# Altium PCB SQUIDCtr_Rev0.PcbDoc (part 4 of 4)
Units mil, origin at the board's own origin, x right, y up, seen from the top; angles counter-clockwise.
Board outline 5765 x 2940 mil, 6 copper layers (Top Layer, Internal Plane 1, Mid-Layer 1, InternalPlane 2, Mid-Layer 2, Bottom Layer), stack 62.5 mil thick; 583 components, 307 nets, 1511 pads, 451 vias.
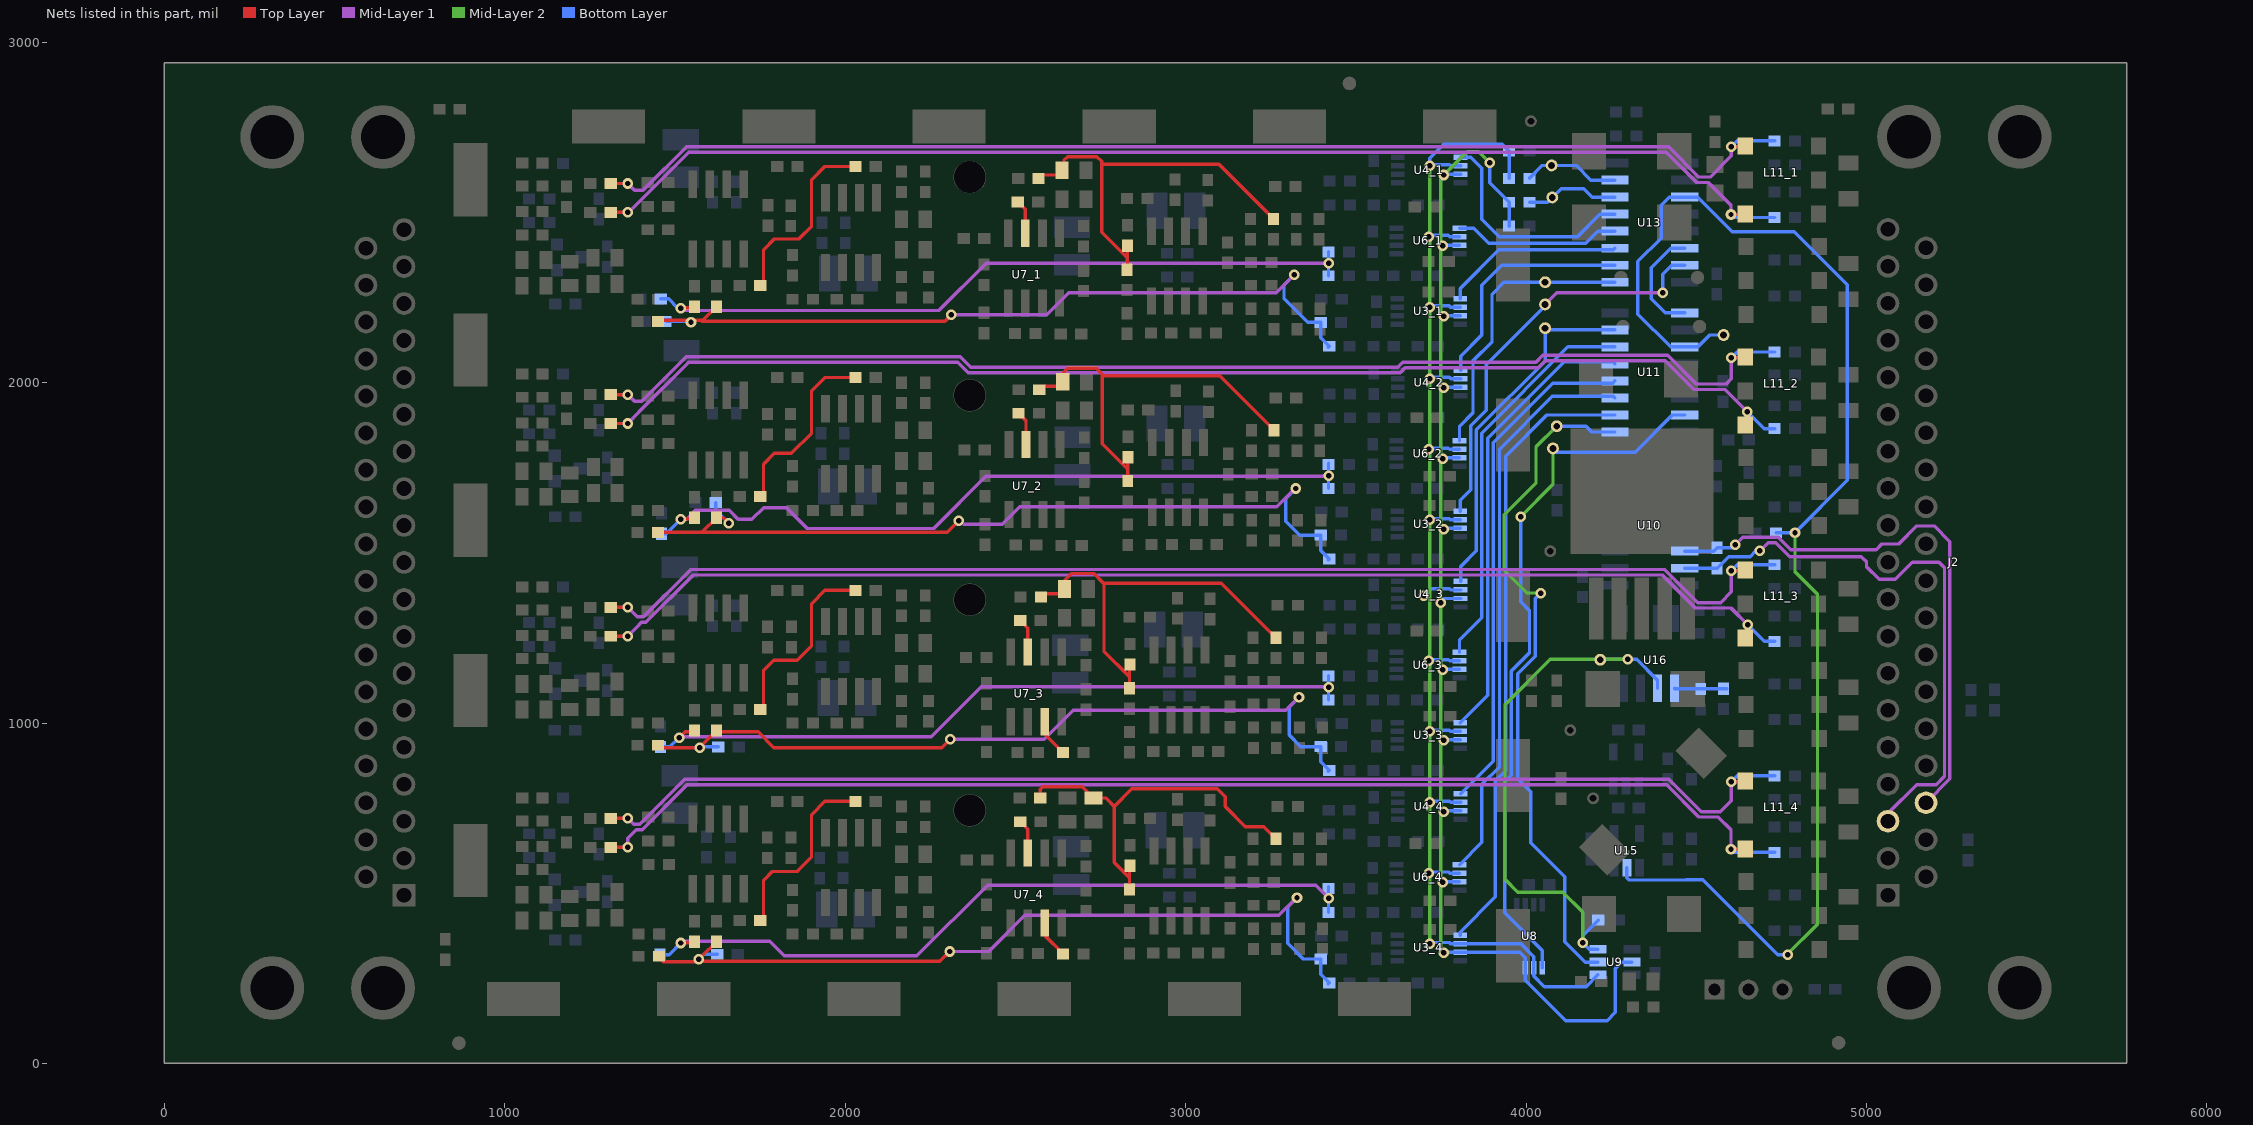
[diagram p8: the nets of this part, all layers, seen from the top]

## Via types
v1: diameter 31, hole 16, Top Layer to Bottom Layer, tented both sides, 451 vias

## Nets (pads, with @x,y where several pads share a name; then routed paths per layer and width w, separated by ;. In a path a pad name is that pad's centre, name@x,y a point inside that pad or via, vN(x,y) a via of type N, cw(c..) or ccw(c..) an arc to the next point about the centre after c; other vN are vias at no path point) (continued)
NetR47_3_2: R47_3.2 U7_3.3 | length 113.4
  Top Layer w10: U7_3.3@2586,1004 2586,967 R47_3.2@2640,913
NetR47_4_2: R47_4.2 U7_4.3 | length 113.4
  Top Layer w10: U7_4.3@2586,413 2586,376 R47_4.2@2640,322
NetR61_1: R61.1 R62.1 U16.1 | length 153.4
  Bottom Layer w10: U16.1@4436,1102 4437,1101 4522,1101 R62.1@4589,1101
NetR64_1_2: R64_1.2 U7_1.7 | length 101.1
  Top Layer w10: R64_1.2@2507,2531 2529,2509 U7_1.7@2529,2439
NetR64_2_2: R64_2.2 U7_2.7 | length 101.1
  Top Layer w10: R64_2.2@2509,1910 2531,1888 U7_2.7@2531,1818
NetR64_3_2: R64_3.2 U7_3.7 | length 101.1
  Top Layer w10: R64_3.2@2514,1301 2536,1279 U7_3.7@2536,1209
NetR64_4_2: R64_4.2 U7_4.7 | length 101.1
  Top Layer w10: R64_4.2@2514,710 2536,688 U7_4.7@2536,618
NetR71_1_2: R71_1.2 R72_1.1 | length 560.9
  Top Layer w10: R72_1.1@1750,2285 1760,2295 1760,2390 1792,2422 1864,2422 1901,2459 1901,2596 1940,2635 R71_1.2@2030,2635
NetR71_2_2: R71_2.2 R72_2.1 | length 548
  Top Layer w10: R72_2.1@1750,1665 1760,1675 1760,1761 1792,1793 1842,1793 1901,1852 1901,1976 1940,2015 R71_2.2@2030,2015
NetR71_3_2: R71_3.2 R72_3.1 | length 559.1
  Top Layer w10: R72_3.1@1750,1040 1760,1050 1760,1155 1790,1185 1859,1185 1901,1227 1901,1351 1940,1390 R71_3.2@2030,1390
NetR71_4_2: R71_4.2 R72_4.1 | length 562
  Top Layer w10: R72_4.1@1750,420 1760,430 1760,538 1786,564 1860,564 1860,566 1901,607 1901,731 1940,770 R71_4.2@2030,770
NetU11_9: U11.9 U13.14 | length 328.6
  Bottom Layer w10: U11.9@4466,2205 4409,2205 4368,2246 4368,2338 4425,2395 U13.14@4466,2395
NULLER_1_N: L11_1.3 R37_1.2 R39_1.2 | length 3622.7
  Top Layer w10: R37_1.2@1321,2500 v1(1361,2500) ; v1(4602,2494) L11_1.3@4647,2494
  Mid-Layer 1 w10: v1(1361,2500) 1363.63,2500 1540.63,2677 4412,2677 4501,2588 4535,2588 4602,2521 v1(4602,2494)
  Bottom Layer w10: v1(4602,2494) 4611,2485 R39_1.2@4730,2485
NULLER_1_P: L11_1.1@4644,2695 R11_1.2 R20_1.2 | length 3614.7
  Top Layer w10: R20_1.2@1321,2585 v1(1361,2585) ; v1(4603,2693) 4648,2693 L11_1.1@4650,2695
  Mid-Layer 1 w10: v1(1361,2585) 1381,2565 1406,2565 1534,2693 4418.63,2693 4507.63,2604 4541,2604 4603,2666 v1(4603,2693)
  Bottom Layer w10: v1(4603,2693) 4620,2710 R11_1.2@4730,2710
NULLER_2_N: L11_2.3 R37_2.2 R39_2.2 | length 3630.7
  Top Layer w10: R37_2.2@1321,1880 v1(1361,1880) ; L11_2.3@4650,1875 v1(4650,1914)
  Mid-Layer 1 w10: v1(1361,1880) 1393.5,1912.5 ; 1394.14,1914.14 1540,2060 2331,2060 2361.69,2029.31 3629.94,2029.31 3644.31,2043.69 4035.69,2043.69 4056,2064 4409,2064 4493,1980 4584,1980 v1(4650,1914)
  Bottom Layer w10: v1(4650,1914) 4699,1865 R39_2.2@4730,1865
NULLER_2_P: L11_2.1@4644,2075 R11_2.2 R20_2.2 | length 3656.5
  Top Layer w10: R20_2.2@1321,1965 v1(1361,1965) ; v1(4603,2073) 4648,2073 L11_2.1@4650,2075
  Mid-Layer 1 w10: v1(1361,1965) 1381,1945 1402,1945 1533,2076 2337.63,2076 2368.31,2045.31 3623.31,2045.31 3637.69,2059.69 4029.06,2059.69 4049.37,2080 4415.63,2080 4499.63,1996 4588,1996 4603,2011 v1(4603,2073)
  Bottom Layer w10: v1(4603,2073) 4620,2090 R11_2.2@4730,2090
NULLER_3_N: L11_3.3 R37_3.2 R39_3.2 | length 3602.4
  Top Layer w10: R37_3.2@1321,1255 v1(1361,1255) ; L11_3.3@4650,1250 4651,1251 v1(4651,1289)
  Mid-Layer 1 w10: v1(1361,1255) 1393.5,1287.5 ; 1394.14,1289.14 1401,1296 1414,1296 1553,1435 4400.37,1435 4497.37,1338 4602,1338 v1(4651,1289)
  Bottom Layer w10: v1(4651,1289) 4700,1240 R39_3.2@4730,1240
NULLER_3_P: L11_3.1@4644,1450 R11_3.2 R20_3.2 | length 3648.6
  Top Layer w10: R20_3.2@1321,1340 v1(1361,1340) ; v1(4603,1448) 4648,1448 L11_3.1@4650,1450
  Mid-Layer 1 w10: v1(1361,1340) 1389,1312 1407.37,1312 1546.37,1451 4407,1451 4504,1354 4571.28,1354 4603,1385.72 v1(4603,1448)
  Bottom Layer w10: v1(4603,1448) 4620,1465 R11_3.2@4730,1465
NULLER_4_N: L11_4.3 R37_4.2 R39_4.2 | length 3662.7
  Top Layer w10: R37_4.2@1321,635 v1(1361,635) ; v1(4602,629) L11_4.3@4647,629
  Mid-Layer 1 w10: v1(1361,635) 1361,662 1386,687 1403.22,687 1535.22,819 3495.81,819 3496.31,818.5 3530.69,818.5 3531.19,819 3763.81,819 3764.31,818.5 3798.69,818.5 3799.19,819 4413,819 4508,724 4564,724 4602,686 v1(4602,629)
  Bottom Layer w10: v1(4602,629) 4611,620 R39_4.2@4730,620
NULLER_4_P: L11_4.1@4644,830 R11_4.2 R20_4.2 | length 3635.7
  Top Layer w10: R20_4.2@1321,720 v1(1361,720) ; v1(4603,828) 4648,828 L11_4.1@4650,830
  Mid-Layer 1 w10: v1(1361,720) 1378.69,702.31 1379.37,703 1396.59,703 1528.59,835 3502.44,835 3502.94,834.5 3524.06,834.5 3524.56,835 3770.44,835 3770.94,834.5 3792.06,834.5 3792.56,835 4419.63,835 4514.63,740 4570.63,740 4570.81,739.81 4603,772 v1(4603,828)
  Bottom Layer w10: v1(4603,828) 4620,845 R11_4.2@4730,845
OFFSET_FILTERED_1: C51_1.1 C62_1.1 R27_1.2 R59_1.1 | length 2145.4
  Top Layer w10: v1@1517,2220 1554,2220 R59_1.1@1557,2223
  Mid-Layer 1 w10: v1(1517,2219) 1524,2212 2275,2212 2414,2351 v1(3420.5,2351)
  Bottom Layer w10: C62_1.1@1458,2246 1481,2246 1508,2219 v1(1517,2219) ; C51_1.1@3419.5,2314 R27_1.2@3419.5,2384
OFFSET_FILTERED_2: C51_2.1 C62_2.1 R27_2.2 R59_2.1 | length 2219.6
  Top Layer w10: v1@1517,1600 1554,1600 R59_2.1@1557,1603
  Mid-Layer 1 w10: v1(1517,1599) 1534,1599 1560,1625 1659,1625 1685,1599 1726,1599 1760,1633 1827.5,1633 1889,1571.5 2259.5,1571.5 2412.5,1724.5 3419,1724.5 v1(3420.5,1726)
  Bottom Layer w10: C62_2.1@1460,1556 1474,1556 v1(1517,1599) ; C51_2.1@3419.5,1689 R27_2.2@3419.5,1759 R27_2.2@3419.5,1764
OFFSET_FILTERED_3: C51_3.1 C62_3.1 R27_3.2 R59_3.1 | length 2171.8
  Top Layer w10: v1(1512,957) 1530,975 1554,975 R59_3.1@1557,978
  Mid-Layer 1 w10: v1@1506,963 v1(1512,957) 1515,960 2253,960 2400,1107 3418.5,1107 v1(3420.5,1105) ; v1@1508,962 v1@1509,962
  Bottom Layer w10: C62_3.1@1457,930 1485,930 v1(1512,957) ; C51_3.1@3419.5,1068 R27_3.2@3419.5,1138 R27_3.2@3419.5,1139
OFFSET_FILTERED_4: C51_4.1 C62_4.1 R27_4.2 R59_4.1 | length 2216.6
  Top Layer w10: v1@1517,355 1554,355 R59_4.1@1557,358
  Mid-Layer 1 w10: v1(1517,354) 1522,359 1778,359 1821,316 2210,316 2418,524 3382.5,524 v1(3420.5,486)
  Bottom Layer w10: C62_4.1@1456,320 1483,320 v1(1517,354) ; C51_4.1@3419.5,444 R27_4.2@3419.5,514 R27_4.2@3419.5,519
REF_2V5_1: C53_1.2 L7_1.1 R44_1.1 R69_1.2 R70_1.2 | length 1195.8
  Top Layer w10: C53_1.2@2568,2600 2578,2610 2637,2610 L7_1.1@2637,2624 2642.5,2629.5 2642.5,2653.5 2653,2664 2739,2664 2753,2650 2753,2641 ; R69_1.2@2828,2332 2828,2366.5 ; R70_1.2@2829,2402 2828,2401 2828,2366.5 ; R44_1.1@3258,2481 3098,2641 2753,2641 ; 2753,2641 2753,2441.5 2828,2366.5
REF_2V5_2: C53_2.2 L7_2.1 R44_2.1 R69_2.2 R70_2.2 | length 1192.7
  Top Layer w10: C53_2.2@2570,1979 2580,1989 2639,1989 L7_2.1@2639,2003 2639,2027 2654,2042 2738,2042 2755,2025 2755,1820.5 2830,1745.5 ; 2755,2020 3100,2020 R44_2.1@3260,1860 ; R69_2.2@2830,1711 2830,1745.5 ; R70_2.2@2831,1781 2830,1780 2830,1745.5
REF_2V5_3: C53_3.2 L7_3.1 R44_3.1 R69_3.2 R70_3.2 | length 1194.5
  Top Layer w10: C53_3.2@2575,1370 2585,1380 2644,1380 L7_3.1@2644,1394 2644,1418 2665.5,1439.5 2729.5,1439.5 2759,1410 ; R69_3.2@2835,1102 2835,1136.5 ; R70_3.2@2836,1172 2835,1171 2835,1136.5 ; R44_3.1@3265,1251 3105,1411 2760,1411 2760,1211.5 2835,1136.5
REF_2V5_4: C53_4.2 L7_4.1 R44_4.1 R69_4.2 R70_4.2 | length 1142.9
  Top Layer w10: C53_4.2@2573,780 2573,806 2580,813 2696,813 L7_4.1@2729,780 2765,780 2790,755 ; R69_4.2@2835,511 2835,545.5 ; R70_4.2@2836,581 2835,580 2835,545.5 ; R44_4.1@3265,660 3229,696 3175,696 3116,755 3116,784 3093,807 2842,807 2790,755 ; 2790,755 2790,590.5 2835,545.5
REG_DEV_MOSI: R31.2 REG_DEV_MOSI.1 U13.6 | length 276.5
  Bottom Layer w10: R31.2@4010,2530 4063,2530 REG_DEV_MOSI.1@4076,2543 ; REG_DEV_MOSI.1@4077,2544 4103,2570 4169,2570 4194,2545 U13.6@4261,2545
REG_DEV_SCK: R16.2 REG_DEV_SCK.1 U13.7 | length 284.6
  Bottom Layer w10: R16.2@4010,2600 4048,2638 4147,2638 4190,2595 U13.7@4261,2595
REG_SCK: R29.1 REG_SCK.1 U11.11 U13.11 U15.2 | length 4066.7
  Mid-Layer 2 w10: v1@4766,319 4856,409 4856,1379 4790,1445 v1(4790,1559)
  Bottom Layer w10: U15.2@4296,575 4296,546 4303,539 4469.94,539 4470.44,539.5 4519.5,539.5 4739,320 v1(4769,320) ; REG_SCK.1@4580,2140 4540,2140 4505,2105 U11.11@4466,2105 4425,2105 4328.5,2201.5 4328.5,2356 4396.5,2424 4396.5,2521.5 4420,2545 U13.11@4466,2545 4504,2545 4606,2443 4788,2443 4944,2287 4944,1713 v1(4790,1559) R29.1@4734,1559
REG_SCLK_N: J2.3 R75.1 U10.7 | length 1723.3
  Mid-Layer 1 w10: v1(4687,1506) 4711,1530 4734,1530 4775,1489 4985,1489 5000,1474 5000,1459 5037,1422 5084,1422 5135,1473 5213,1473 5229,1457 5229,843 5205,819 5147,819 5063.08,735.08 J2.3@5063.08,711.7
  Bottom Layer w10: U10.7@4466,1455 R75.1@4561,1455 4595,1489 4658,1489 4675,1506 v1(4687,1506)
REG_SCLK_P: J2.22 R75.2 U10.6 | length 1655.4
  Mid-Layer 1 w10: v1(4615,1524) 4637,1546 4740.63,1546 4777.63,1509 5028,1509 5045,1526 5095,1526 5148,1579 5199,1579 5245,1533 5245,836.1 J2.22@5174.89,765.99
  Bottom Layer w10: U10.6@4466,1505 4551,1505 R75.2@4561,1515 4606,1515 v1(4615,1524)
SPI_CLK: R16.1 R28.1 U3_1.6 U3_2.6 U3_3.6 U3_4.6 U4_1.6 U4_2.6 U4_3.6 U4_4.6 U6_1.6 U6_2.6 U6_3.6 U6_4.6 U8.6 U9.4 | length 4307.1
  Mid-Layer 2 w10: v1(3700,1374) 3717.5,1374 ; v1(3716.5,352) 3717.5,353 v1(3717.5,767) 3717.5,1374 ; v1(3717.5,2637) 3717.5,2223 v1(3716.5,2222) 3716.5,2013 v1(3717.5,2012) 3717.5,1374
  Bottom Layer w10: v1@3700.25,1373.75 3721,1394.5 3775,1394.5 3778.5,1391 U4_3.6@3807.5,1391 ; v1(3714.5,559) 3718,562.5 3772,562.5 3775.5,559 U6_4.6@3804.5,559 ; v1(3714.5,1183) 3718,1186.5 3772,1186.5 3775.5,1183 U6_3.6@3804.5,1183 ; v1(3714.5,1804) 3718,1807.5 3772,1807.5 3775.5,1804 U6_2.6@3804.5,1804 ; v1(3714.5,2429) 3718,2432.5 3772,2432.5 3775.5,2429 U6_1.6@3804.5,2429 ; v1(3716.5,352) 3720,355.5 3774,355.5 3777.5,352 U3_4.6@3806.5,352 3985,352 4023,314 U8.6@4023,281 4023,257 4054,226 4176.5,226 U9.4@4211,260.5 ; v1(3716.5,976) 3720,979.5 3774,979.5 3777.5,976 U3_3.6@3806.5,976 ; v1(3716.5,1597) 3720,1600.5 3774,1600.5 3777.5,1597 U3_2.6@3806.5,1597 ; v1(3716.5,2222) 3720,2225.5 3774,2225.5 3777.5,2222 U3_1.6@3806.5,2222 ; v1(3717.5,767) 3721,770.5 3775,770.5 3778.5,767 U4_4.6@3807.5,767 ; v1(3717.5,2012) 3721,2015.5 3775,2015.5 3778.5,2012 U4_2.6@3807.5,2012 ; U4_1.6@3807.5,2637 3778.5,2637 3775,2640.5 3721,2640.5 v1(3717.5,2637) 3717.5,2659 3758.5,2700 3930,2700 R28.1@3950,2680 R16.1@3950,2600
SPI_CS0: CS0.1 U8.5 U11.15 | length 2089
  Mid-Layer 2 w10: v1(3984,1606) 4079,1701 CS0.1@4079,1807
  Bottom Layer w10: v1(3984,1606) 3984,1356 4010,1330 4010,1206 3957,1153 3957,847 3937,827 3937,443 4048,332 U8.5@4048,281 ; CS0.1@4079,1807 4090,1796 4321,1796 4430,1905 U11.15@4466,1905
SPI_CS1: CS1.1 U9.5 U11.1 | length 2041.6
  Mid-Layer 2 w10: v1(4043,1382) 4004,1382 3935,1451 3935,1610 4029,1704 4029,1811 CS1.1@4090,1872
  Bottom Layer w10: v1(4043,1382) 4027,1366 4027,1196 3976,1145 3976,836 4014,798 4014,649 4114,549 4114,358 4174,298 U9.5@4211,298 ; CS1.1@4079,1872 CS1.1@4090,1872 4176,1872 4193,1855 U11.1@4261,1855
SPI_CS2: U3_4.5 U11.2 | length 1833.4
  Bottom Layer w10: U3_4.5@3806.5,377 3806.5,386 3910,489.5 3910,830 3940,860 3940,1784 4061,1905 U11.2@4261,1905
SPI_CS3: U6_4.5 U11.3 | length 1674.9
  Bottom Layer w10: U6_4.5@3804.5,584 3870,649.5 3870,820 3922,872 3922,1805 4077,1960 4256,1960 U11.3@4261,1955
SPI_CS4: U4_4.5 U11.4 | length 1503.9
  Bottom Layer w10: U4_4.5@3807.5,792 3904,888.5 3904,1824 4078,1998 4254,1998 U11.4@4261,2005
SPI_CS5: U3_3.5 U11.5 | length 1339
  Bottom Layer w10: U3_3.5@3806.5,1001 3887,1081.5 3887,1837 4111.5,2061.5 4254.5,2061.5 U11.5@4261,2055
SPI_CS6: U6_3.5 U11.6 | length 1166.9
  Bottom Layer w10: U6_3.5@3804.5,1208 3804.5,1244.5 3870,1310 3870,1852 4123,2105 U11.6@4261,2105
SPI_CS7: CS7.1 U4_3.5 U11.7 | length 1054
  Bottom Layer w10: U4_3.5@3807.5,1416 3807.5,1459.93 3854,1506.43 3854,1861 4056,2063 CS7.1@4056,2160 4061,2155 U11.7@4261,2155
SPI_CS8: CS8.1 U3_2.5 U13.15 | length 1200.6
  Mid-Layer 1 w10: CS8.1@4056,2230 4090,2264 v1(4401,2264)
  Bottom Layer w10: U3_2.5@3806.5,1622 3806.5,1654.5 3837,1685 3837,1873.07 3883,1919.07 3883,2053 4056,2226 CS8.1@4056,2230 ; v1(4401,2264) 4401,2318 4428,2345 U13.15@4466,2345
SPI_CS9: CS9.1 U6_2.5 U13.1 | length 846.1
  Bottom Layer w10: U6_2.5@3804.5,1829 3804.5,1871.5 3844,1911 3844,2064 3900,2120 3900,2260 3935,2295 CS9.1@4056,2295 U13.1@4261,2295
SPI_CS10: U4_2.5 U13.2 | length 690.3
  Bottom Layer w10: U4_2.5@3807.5,2037 3807.5,2077.5 3870,2140 3870,2286 3929,2345 U13.2@4261,2345
SPI_CS11: U3_1.5 U13.3 | length 533.1
  Bottom Layer w10: U3_1.5@3806.5,2247 3806.5,2276.5 3920,2390 4256,2390 U13.3@4261,2395
SPI_CS12: U6_1.5 U13.4 | length 489.2
  Bottom Layer w10: U6_1.5@3804.5,2454 3846,2454 3890,2410 4175,2410 4210,2445 U13.4@4261,2445
SPI_CS13: U4_1.5 U13.5 | length 665.2
  Bottom Layer w10: U4_1.5@3807.5,2662 3838,2662 3870,2630 3870,2480 3921,2429 4151,2429 4217,2495 U13.5@4261,2495
SPI_MISO: R67.1 SPI_MISO.1 U9.6 U16.2 | length 1641.8
  Mid-Layer 2 w10: v1(4166,355) 4166,445 4108,503 3976,503 3938,541 3938,1054 4071,1187 v1(4298,1187)
  Bottom Layer w10: U9.6@4211,335.5 4185.5,335.5 v1(4166,355) 4166,375 R67.1@4212,421 ; SPI_MISO.1@4218,1186 4219,1187 4325.21,1187 4386,1126.21 U16.2@4386,1102
SPI_MOSI: R30.1 R31.1 U3_1.7 U3_2.7 U3_3.7 U3_4.7 U4_1.7 U4_2.7 U4_3.7 U4_4.7 U6_1.7 U6_2.7 U6_3.7 U6_4.7 U8.7 U9.2 | length 4063.1
  Mid-Layer 2 w10: v1(3757.5,325) 3749,333.5 3749,2600.5 v1(3758.5,2610) 3826.5,2678 3861,2678 v1(3893,2646)
  Bottom Layer w10: v1(3749,1354) 3749,1354.5 3760.5,1366 U4_3.7@3807.5,1366 ; v1(3755.5,532) 3757.5,534 U6_4.7@3804.5,534 ; v1(3755.5,1156) 3757.5,1158 U6_3.7@3804.5,1158 ; v1(3755.5,1777) 3757.5,1779 U6_2.7@3804.5,1779 ; v1(3755.5,2402) 3757.5,2404 U6_1.7@3804.5,2404 ; v1(3757.5,325) 3759.5,327 U3_4.7@3806.5,327 3982,327 3998,311 U8.7@3998,281 3998,245 4117,126 4238,126 4262,150 4262,279 4281,298 U9.2@4311,298 ; v1(3757.5,949) 3759.5,951 U3_3.7@3806.5,951 ; v1(3757.5,1570) 3759.5,1572 U3_2.7@3806.5,1572 ; v1(3757.5,2195) 3759.5,2197 U3_1.7@3806.5,2197 ; v1(3758.5,740) 3760.5,742 U4_4.7@3807.5,742 ; v1(3758.5,1985) 3760.5,1987 U4_2.7@3807.5,1987 ; v1(3758.5,2610) 3760.5,2612 U4_1.7@3807.5,2612 ; v1(3893,2646) 3893,2587 R31.1@3950,2530 R30.1@3950,2460
SQUID_BIAS_FILTERED_1: C13_1.1 C61_1.1 R41_1.2 R51_1.1 R81_1.1 | length 2381.6
  Top Layer w10: R81_1.1@1440,2180 1443,2183 1582,2183 R51_1.1@1622,2223 ; 1579,2180 2293,2180 v1(2312,2199)
  Mid-Layer 1 w10: v1(2312,2199) 2592,2199 2657,2264 3266,2264 v1(3319,2317)
  Bottom Layer w10: C61_1.1@1476,2180 1543,2180 1547,2184 v1(1547,2178) ; v1(2312,2199) v1@2314,2201 ; v1(3319,2317) 3289,2287 3289,2247 3359,2177 R41_1.2@3396.5,2177 3396.5,2132 C13_1.1@3421.5,2107 C13_1.1@3418.5,2104
SQUID_BIAS_FILTERED_2: C13_2.1 C61_2.1 R41_2.2 R51_2.1 R81_2.1 | length 2429.2
  Top Layer w10: R81_2.1@1450,1560 1579,1560 ; v1(1658,1587) 1642,1603 R51_2.1@1622,1603 1579,1560 ; v1(2334,1594) 2300,1560 1579,1560
  Mid-Layer 1 w10: v1(2334,1594) 2338,1594 2348,1584 2461,1584 2512,1635 3268,1635 v1@3324,1691
  Bottom Layer w10: C61_2.1@1620,1648 1620,1625 v1(1658,1587) ; v1(3324,1689) 3294,1659 3294,1593 3335,1552 R41_2.2@3396.5,1552 3396.5,1507 C13_2.1@3421.5,1482 C13_2.1@3418.5,1479
SQUID_BIAS_FILTERED_3: C13_3.1 C61_3.1 R41_3.2 R51_3.1 R81_3.1 | length 2362.9
  Top Layer w10: R81_3.1@1450,935 1457,928 v1(1572,928) ; v1@1572.5,928.5 R51_3.1@1618,974 ; R51_3.1@1622,978 R51_3.1@1618,974 ; v1(2308,952) 2284,928 1790,928 1744,974 R51_3.1@1618,974
  Mid-Layer 1 w10: v1(2308,952) 2584,952 2670,1038 3294,1038 3327.5,1071.5 v1@3337.5,1071.5
  Bottom Layer w10: v1(1572,928) 1574,930 C61_3.1@1627,930 ; v1(3333,1076) 3304,1047 3304,965 3338,931 R41_3.2@3396.5,931 3396.5,886 C13_3.1@3421.5,861 C13_3.1@3418.5,858
SQUID_BIAS_FILTERED_4: C13_4.1 C61_4.1 R41_4.2 R51_4.1 R81_4.1 | length 2433.8
  Top Layer w10: R81_4.1@1450,315 1466,299 1563,299 v1(1570,306) 1576,300 2278,300 v1(2307,329) ; v1@1579,315 R51_4.1@1622,358
  Mid-Layer 1 w10: v1(2307,329) 2421,329 2527,435 3274,435 3326,487 v1(3327,487) v1@3328,487
  Bottom Layer w10: v1(1570,306) 1585,321 C61_4.1@1624,321 ; v1(3327,487) 3300,460 3300,353 3346,307 R41_4.2@3396.5,307 3396.5,262 C13_4.1@3421.5,237 C13_4.1@3418.5,234
pads on no net: FM1.0 FM1.1 FM2.0 FM2.1 FM3.0 FM3.1 L2_1.1@4643,2444 L2_2.1@4643,1824 L2_3.1@4643,1199 L2_4.1@4643,579 L11_1.1@4641,2739 L11_2.1@4641,2119 L11_3.1@4641,1494 L11_4.1@4641,874 U1_1.0 U1_2.0 U1_3.0 U1_4.0 U2_1.0 U2_1.1 U2_1.5 U2_1.8 U2_2.0 U2_2.1 U2_2.5 U2_2.8 U2_3.0 U2_3.1 U2_3.5 U2_3.8 U2_4.0 U2_4.1 U2_4.5 U2_4.8 U3_1.2 U3_1.3 U3_2.2 U3_2.3 U3_3.2 U3_3.3 U3_4.2 U3_4.3 U4_1.2 U4_1.3 U4_2.2 U4_2.3 U4_3.2 U4_3.3 U4_4.2 U4_4.3 U5_1.0 U5_1.7 U5_2.0 U5_2.7 U5_3.0 U5_3.7 U5_4.0 U5_4.7 U6_1.2 U6_1.3 U6_2.2 U6_2.3 U6_3.2 U6_3.3 U6_4.2 U6_4.3 U7_1.0 U7_1.5 U7_2.0 U7_2.5 U7_3.0 U7_3.5 U7_4.0 U7_4.5 U8.2 U8.3 U10.13 U10.14 U10.15 U13.9 U14.1 U15.1 U16.0 U16.3

## Polygon pours and split planes (outlines as drawn)
GND on Mid-Layer 2 "Bottom Layer-No Net" (solid, pour order 3): 459,2842 459,103.93 5488,103.93 5489,103 5489,2841.07
5VD on Mid-Layer 2 "Poly5VD" (solid, pour order 2): 4299,2840 4592.81,2840 4594,243.35 4594,149 4593.41,149.98 4296,149.98
GND on Mid-Layer 1 "Bottom Layer-No Net" (solid, pour order 5): 459,2829.29 459,110.71 5489,110.71 5489,2829
5VA on Internal Plane 1 (split plane): 5467,20.1 481,20.1 481,2919.9 5467,2919.9
GND on InternalPlane 2 (split plane): 5474,20.1 477,20.1 477,2919.9 5474,2919.9

## Keep-outs
Keep-Out Layer:
  lines w1: 5665,100 100,100 100,2840 5665,2840
  lines w4: 5765,0 5765,2940

## Other copper
Top Layer:
  text "L1 (TOP) .GTL" at -2612.5,2638.5 h100
Mid-Layer 1:
  pour cut-out: 1452,2466 1452,2413 1539,2413 1539,2263 1672,2263 1672,2423 1595,2423 1596,2424 1596,2466
  pour cut-out: 1452.07,1838.93 1452.07,1785.93 1539.07,1785.93 1539.07,1635.93 1672.07,1635.93 1672.07,1795.93 1595.07,1795.93 1596.07,1796.93 1596.07,1838.93
  pour cut-out: 1449,1216 1449,1163 1536,1163 1536,1013 1669,1013 1669,1173 1592,1173 1593,1174 1593,1216
  pour cut-out: 1450,609 1450,556 1537,556 1537,406 1670,406 1670,566 1593,566 1594,567 1594,609
  pour cut-out: 1833,2658 1833,2615 1924,2615 1924,2498 1974,2498 1974,2658
  pour cut-out: 1833,2038 1833,1995 1924,1995 1924,1878 1974,1878 1974,2038
  pour cut-out: 1833,1413 1833,1370 1924,1370 1924,1253 1974,1253 1974,1413
  pour cut-out: 1833,793 1833,750 1924,750 1924,633 1974,633 1974,793
  pour cut-out: 1823,2355 1823,2394 1960,2394 1960,2291 1921,2291 1921,2355
  pour cut-out: 1823,1735 1823,1774 1960,1774 1960,1671 1921,1671 1921,1735
  pour cut-out: 1823.76,1111 1823.76,1150 1960.76,1150 1960.76,1047 1921.76,1047 1921.76,1111
  pour cut-out: 1823,490 1823,529 1960,529 1960,426 1921,426 1921,490
  pour cut-out: 1823,1110 1823,1149 1960,1149 1960,1046 1921,1046 1921,1110
  pour cut-out: 837,2129.56 2354,2129.56 2397,2086.56 2398,2087.56 4028.09,2087.56 4027,2072 3986,2061.56 2388,2061.56 2379.24,2061 2345.43,2094.84 1533,2096.39 837,2103.56
  pour cut-out: 837,1530 2274,1530 2324,1480 3979,1480 4014,1470 4014,1457 3994,1456 2312,1456 2263,1505 837,1505
  pour cut-out: 850,868 3991,868 4067,842 850,842
  text "L3 (ML1) .G1" at -2610,2290 h100
Mid-Layer 2:
  pour cut-out: 1452,2466 1452,2413 1539,2413 1539,2263 1672,2263 1672,2423 1595,2423 1596,2424 1596,2466
  pour cut-out: 1452.07,1838.93 1452.07,1785.93 1539.07,1785.93 1539.07,1635.93 1672.07,1635.93 1672.07,1795.93 1595.07,1795.93 1596.07,1796.93 1596.07,1838.93
  pour cut-out: 1449,1216 1449,1163 1536,1163 1536,1013 1669,1013 1669,1173 1592,1173 1593,1174 1593,1216
  pour cut-out: 1450,609 1450,556 1537,556 1537,406 1670,406 1670,566 1593,566 1594,567 1594,609
  pour cut-out: 1833,2658 1833,2615 1924,2615 1924,2498 1974,2498 1974,2658
  pour cut-out: 1833,2038 1833,1995 1924,1995 1924,1878 1974,1878 1974,2038
  pour cut-out: 1833,1413 1833,1370 1924,1370 1924,1253 1974,1253 1974,1413
  pour cut-out: 1833,793 1833,750 1924,750 1924,633 1974,633 1974,793
  pour cut-out: 1823,2355 1823,2394 1960,2394 1960,2291 1921,2291 1921,2355
  pour cut-out: 1823,1735 1823,1774 1960,1774 1960,1671 1921,1671 1921,1735
  pour cut-out: 1823.76,1111 1823.76,1150 1960.76,1150 1960.76,1047 1921.76,1047 1921.76,1111
  pour cut-out: 1823,490 1823,529 1960,529 1960,426 1921,426 1921,490
  pour cut-out: 1823,1110 1823,1149 1960,1149 1960,1046 1921,1046 1921,1110
  pour cut-out: 837,2129.56 2354,2129.56 2397,2086.56 2398,2087.56 3696.11,2087.56 3696.11,2079 3696,2067 3696,2062 2388,2061.56 2346,2103.56 837,2103.56
  pour cut-out: 837,1530 2274,1530 2324,1480 3697.11,1480 3697.11,1456 2312,1456 2263,1505 837,1505
  pour cut-out: 850,868 3697.11,868 3697.11,842 850,842
  text "L5 (ML2) .G2" at -2615,1945 h100
Bottom Layer:
  text "L6 (BOT) .GBL" at -1705,1750 h100
InternalPlane 2 (plane layer: these items are gaps in the copper):
  rectangle: 5474,0 5761,2940
  rectangle: -18,-13 477,2948
  region: 1937,750 1937,793 1833,793 1833,750
  rectangle: 1924,633 1974,793
  region: 1937,1370 1937,1413 1833,1413 1833,1370
  rectangle: 1924,1253 1974,1413
  region: 1937,1995 1937,2038 1833,2038 1833,1995
  rectangle: 1924,1878 1974,2038
  rectangle: 1924,2498 1974,2658
  region: 1937,2615 1937,2658 1833,2658 1833,2615
  rectangle: 1921,426 1960,529
  region: 1926,490 1926,529 1823,529 1823,490
  rectangle: 1921,1046 1960,1149
  region: 1926,1110 1926,1149 1823,1149 1823,1110
  rectangle: 1921,1671 1960,1774
  region: 1926,1735 1926,1774 1823,1774 1823,1735
  region: 1926,2355 1926,2394 1823,2394 1823,2355
  rectangle: 1921,2291 1960,2394
  rectangle: 1539,1641 1667,1803
  rectangle: 1539,2263 1672,2423
  rectangle: 1452,2413 1596,2466
  rectangle: 1452.07,1785.93 1596.07,1838.93
  rectangle: 1538,1013 1666,1175
  rectangle: 1449,1152 1593,1216
  rectangle: 1450,545 1594,609
  rectangle: 1539,397 1667,568
  pour cut-out: 2951,2558.88 2950,2557.88 2950,2516.88 2978,2516.88 2981,2513.88 2981,2403.88 3015,2403.88 3016,2402.88 3016,2534.88 3053,2571.88 3089,2571.88 3089,2589.88 3087,2591.88 3040,2591.88 3007,2558.88 3006,2559.88 2950,2559.88
  pour cut-out: 3051,2164.88 3051,2126.88 3050,2125.88 2936,2125.88 2936,2192.88 2935,2193.88 2965,2193.88 2965,2168.88 2967,2166.88 3049,2166.88
  pour cut-out: 2953,1937 2952,1936 2952,1895 2980,1895 2983,1892 2983,1782 3017,1782 3018,1781 3018,1913 3055,1950 3091,1950 3091,1968 3089,1970 3042,1970 3009,1937 3008,1938 2952,1938
  pour cut-out: 3053,1543 3053,1505 3052,1504 2938,1504 2938,1571 2937,1572 2967,1572 2967,1547 2969,1545 3051,1545
  pour cut-out: 2958,1328 2957,1327 2957,1286 2985,1286 2988,1283 2988,1173 3022,1173 3023,1172 3023,1304 3060,1341 3096,1341 3096,1359 3094,1361 3047,1361 3014,1328 3013,1329 2957,1329
  pour cut-out: 3058,934 3058,896 3057,895 2943,895 2943,962 2942,963 2972,963 2972,938 2974,936 3056,936
  pour cut-out: 2959,737 2958,736 2958,695 2986,695 2989,692 2989,582 3023,582 3024,581 3024,713 3061,750 3097,750 3097,768 3095,770 3048,770 3015,737 3014,738 2958,738
  pour cut-out: 3059,343 3059,305 3058,304 2944,304 2944,371 2943,372 2973,372 2973,347 2975,345 3057,345
  lines w25: 837,2117 2342,2117 2345,2117 2386,2076 3980,2076 ; 847,1517 2271,1517 2321,1467 2353,1467 3978,1467 ; 857,853 3991,853
  text "L4 (GND) .GP2" at -2615,2110 h100
Internal Plane 1 (plane layer: these items are gaps in the copper):
  rectangle: 5467,8 5761,2940
  rectangle: -14,-13 481,2951
  rectangle: 1924,633 1974,793
  region: 1937,750 1937,793 1833,793 1833,750
  rectangle: 1924,1253 1974,1413
  region: 1937,1370 1937,1413 1833,1413 1833,1370
  rectangle: 1924,1878 1974,2038
  region: 1937,1995 1937,2038 1833,2038 1833,1995
  region: 1937,2615 1937,2658 1833,2658 1833,2615
  rectangle: 1924,2498 1974,2658
  region: 1926,2355 1926,2394 1823,2394 1823,2355
  rectangle: 1921,2291 1960,2394
  rectangle: 1921,426 1960,529
  region: 1926,490 1926,529 1823,529 1823,490
  rectangle: 1921,1046 1960,1149
  region: 1926,1110 1926,1149 1823,1149 1823,1110
  rectangle: 1921,1671 1960,1774
  region: 1926,1735 1926,1774 1823,1774 1823,1735
  rectangle: 1539,1641 1672,1802
  rectangle: 1539,2263 1672,2422
  rectangle: 1452,2413 1596,2466
  rectangle: 1452.07,1785.93 1596.07,1838.93
  rectangle: 1449,1152 1593,1216
  rectangle: 1538,1013 1666,1175
  rectangle: 1539,391 1667,563
  rectangle: 1450,545 1594,609
  pour cut-out: 2959,737 2958,736 2958,695 2986,695 2989,692 2989,582 3023,582 3024,581 3024,713 3061,750 3097,750 3097,768 3095,770 3048,770 3015,737 3014,738 2958,738
  pour cut-out: 3059,343 3059,305 3058,304 2944,304 2944,371 2943,372 2973,372 2973,347 2975,345 3057,345
  pour cut-out: 2958,1328 2957,1327 2957,1286 2985,1286 2988,1283 2988,1173 3022,1173 3023,1172 3023,1304 3060,1341 3096,1341 3096,1359 3094,1361 3047,1361 3014,1328 3013,1329 2957,1329
  pour cut-out: 3058,934 3058,896 3057,895 2943,895 2943,962 2942,963 2972,963 2972,938 2974,936 3056,936
  pour cut-out: 2953,1937 2952,1936 2952,1895 2980,1895 2983,1892 2983,1782 3017,1782 3018,1781 3018,1913 3055,1950 3091,1950 3091,1968 3089,1970 3042,1970 3009,1937 3008,1938 2952,1938
  pour cut-out: 3053,1543 3053,1505 3052,1504 2938,1504 2938,1571 2937,1572 2967,1572 2967,1547 2969,1545 3051,1545
  pour cut-out: 3051,2164 3051,2126 3050,2125 2936,2125 2936,2192 2935,2193 2965,2193 2965,2168 2967,2166 3049,2166
  pour cut-out: 2951,2558 2950,2557 2950,2516 2978,2516 2981,2513 2981,2403 3015,2403 3016,2402 3016,2534 3053,2571 3089,2571 3089,2589 3087,2591 3040,2591 3007,2558 3006,2559 2950,2559
  lines w25: 841.68,2117 2319,2117 2346,2117 2388,2075 3979,2075 ; 854,1516 2271,1516 2320,1467 3979,1467 ; 856,856 3981,856
  text "L2 (5VA) .GP1" at -2615,2450 h100

## Silkscreen, mask and mechanical layers (free items; w line width, h text height)
Top Overlay:
  lines w3: 274,335 274,2616 ; 5493,339 5493,2618.37
  text "MEZZ CONNECTOR" at 5104,2874 h60
  text "PreAmp" at 1444,2872 h60
  text "CRYOSTAT CONNECTOR" at 87,2870 h60
  text "DiffAmp" at 1939,2870 h60
  text "2.5VRef" at 2465,2863 h60
  text "RefBuff" at 2912,2861 h60
  text "Transformers" at 4596,2861 h60
  text "CH1" at 3534,2363 h60
  text "Short Connector board edge here" at 5458,1860 h25 r270
  text "CH2" at 3537,1741 h60
  text "Regs" at 4070,1735 h60 r270
  text "TOP IDENT (.GTO)" at -2642.5,1418.5 h100
  text "CH3" at 3534,1109 h60
  text "Short Connector board edge here" at 310,1104 h25 r90
  text "CH4" at 3528,495 h60
  text "+6.5  +5.5  Gnd" at 4501,67 h20
  text "AuxPower" at 4164,46 h60
Bottom Overlay:
  region: 2879,1705 2879,2405 2729,2405 2729,1705
  lines w3: 513,1472 658,1472 ; 546,2012 661,2012 ; 552,927 659,927 ; 5112,925 5273,925 ; 5118,1469 5263,1469 ; 5118,2010 5246,2010 ; 5222,537 5369,537
  lines w5: 3195,829 3905,829 ; 3195,1453 3905,1453 ; 3195,2075 3905,2075
  text "CRYOSTAT CONNECTOR" at 816,2874 h60
  text "MEZZ CONNECTOR" at 5619,2872 h60
  text "DACs" at 3663,2758 h60
  text "FluxBias" at 3300,2605 h60
  text "Offset" at 3235,2424 h60
  text "ShiftRegs" at 4149,2341 h60 r90
  text "SqdBias" at 3289,2282 h60
  text "35" at 528,2147 h60
  text "35" at 5379,2138 h60
  text "15" at 532,1980 h60
  text "15" at 5375,1971 h60
  text "30" at 521,1605 h60
  text "30" at 5386,1596 h60
  text "LVDSRx" at 3979,1564 h60 r90
  text "10" at 500,1443 h60
  text "10" at 5377,1434 h60
  text "LVDSTx" at 4152,1302 h60 r90
  text "BOTTOM IDENT (.GBO)" at -1192.5,1206 h100
  text "25" at 5533,1063 h60
  text "25" at 530,1062 h60
  text "5" at 533,897 h60
  text "5" at 5330,895 h60
  text "Schmitt" at 4162,853 h60
  text "McGill DAN Squid Controller" at 3065,683 h60 r270
  text "Made in CANADA   June 2012" at 828,641 h60 r270
  text "Buff" at 4128,634 h60
  text "Board Serial:" at 2727,589 h60 r270
  text "MGDSQ4 (Rev 0)" at 2804,589 h60 r270
  text "20" at 533,520 h60
  text "20" at 5484,514 h60
  text "Matt.Dobbs@McGill.ca" at 2023,206 h60
  text "Temp" at 4434,161 h60
  text "HeaterDAC" at 4126,131 h60
  text "adamjohngilbert@gmail.com" at 2186,116 h60
Top Paste:
  text "TOP SOLDER PASTE (.GTP)" at -2692.5,786 h100
Bottom Paste:
  text "BOTTOM SOLDER PASTE (.GBP)" at -552.5,386 h100
Top Solder:
  text "TOP SOLDER MASK (.GTS)" at -2712.5,1006 h100
Bottom Solder:
  text "BOTTOM SOLDER MASK (.GBS)" at -572.5,586 h100
Mechanical 1:
  the board outline again, w4
  text "Mechanical 1 (GM1)" at -2595,-220 h100
  text "Nominal Size: 146.43mm x 74.68mm mm" at 2336.82,-225.11 h100
  text "Nominal Size: 5.765 x 2.940 inches" at 2341.82,-452.61 h100
  text "FINISHED BOARD: 0.062\" (Nom)  FR4" at 2333.01,-714.48 h100
  text "McGill DAN Squid Controller - MGDSQ4" at -1400,-845 h100
  text "ARRANGE LAYERS SEQUENTIALLY: L1-L6" at 2306.82,-935.11 h100
  text "Rev 0 - Made in CANADA - July 2012" at -1381.99,-1059.48 h100
  text "Black Solder Mask & White Text" at 2319.5,-1117 h100
  text "Copyright 2012, McGill University" at -1361.99,-1304.48 h100
  text "RoHS" at 2330,-1315 h100
  text "Contact: Matt.Dobbs@McGill.ca  or  adamjohngilbert@gmail.com" at -1354.85,-1497.32 h60
  text "Please add Serial number e.g 001 after 'Serial Number:'" at 2243,-1830 h48
Drill Drawing:
  lines w5: 6730,3305 8580.39,3305
  lines w20: 6895.44,3085.7 7485.99,3085.7 ; 6915,2835 7426.81,2835 ; 6919.81,2202.09 7431.62,2202.09 ; 6919.81,2640.09 7431.62,2640.09 ; 6920,1915 7431.81,1915 ; 6923.19,2445 7435,2445
  text "FR4: 6 Layer PCB, Approximate Build:" at 6670,3370 h60
  text "L1" at 6368.25,3054.75 h80
  text "TopLayer 1/2 Oz + Plating" at 7525.36,3046.33 h60
  text ".GTL" at 9048.25,3034.75 h60
  text ".Legend" at -2495,2990 h100
  text "11 mils spacing (adjustable)" at 6620,2925 h60
  text "L2" at 6368.25,2814.75 h80
  text ".GP1" at 9048.25,2814.75 h60
  text "Plane 1  1 Oz" at 7513.19,2812.29 h60
  text "13 mils spacing" at 6610.71,2711.94 h60
  text "L3" at 6368.25,2614.75 h80
  text "MidLayer1 1 Oz" at 7469.9,2607.62 h60
  text ".G1" at 9055,2595 h60
  text "7.5 mils spacing" at 6618.25,2511.75 h60
  text "Plane 2   1 Oz" at 7483.19,2429.29 h60
  text "L4" at 6381,2419 h80
  text ".GP2" at 9050,2390 h60
  text "13 mils spacing" at 6615.71,2298.94 h60
  text "L5" at 6378.5,2196.5 h80
  text "MidLayer2  1 Oz" at 7488.25,2176.75 h60
  text ".G2" at 9055,2160 h60
  text "11 mils spacing (adjustable)" at 6608.21,2026.94 h60
  text "Bottom  1/2 Oz + Plating" at 7505.36,1896.33 h60
  text ".GBL" at 9045,1895 h60
  text "L6" at 6386,1866.5 h80
  text "Total thickness = .062\"" at 7075,1610 h60
  text "DRILL DRAWING (.GD1)" at -2595,-15 h100

## Text inside footprints (layer, text, board x,y; h text height)
J1: Top Overlay "37" at 469.87,2346.14 h40 r90; Top Overlay "20" at 469.87,503.85 h40 r90; Top Overlay "19" at 843.88,2405.41 h40 r90; Top Overlay "1" at 843.88,483.95 h40 r90
J2: Top Overlay "20" at 5298,583 h40 r270; Top Overlay "19" at 4955,2470 h40 r270; Top Overlay "1" at 5035,415 h40 r270; Top Overlay "37" at 5297.13,2440.15 h40 r270